# Altium PCB PowerSupplyPCB.PcbDoc
Units mm, origin at the board's own origin, x right, y up, seen from the top; angles counter-clockwise.
Board outline 100 x 50 mm, 2 copper layers (Top Layer, Bottom Layer); 11 components, 8 nets, 38 pads, 0 vias.
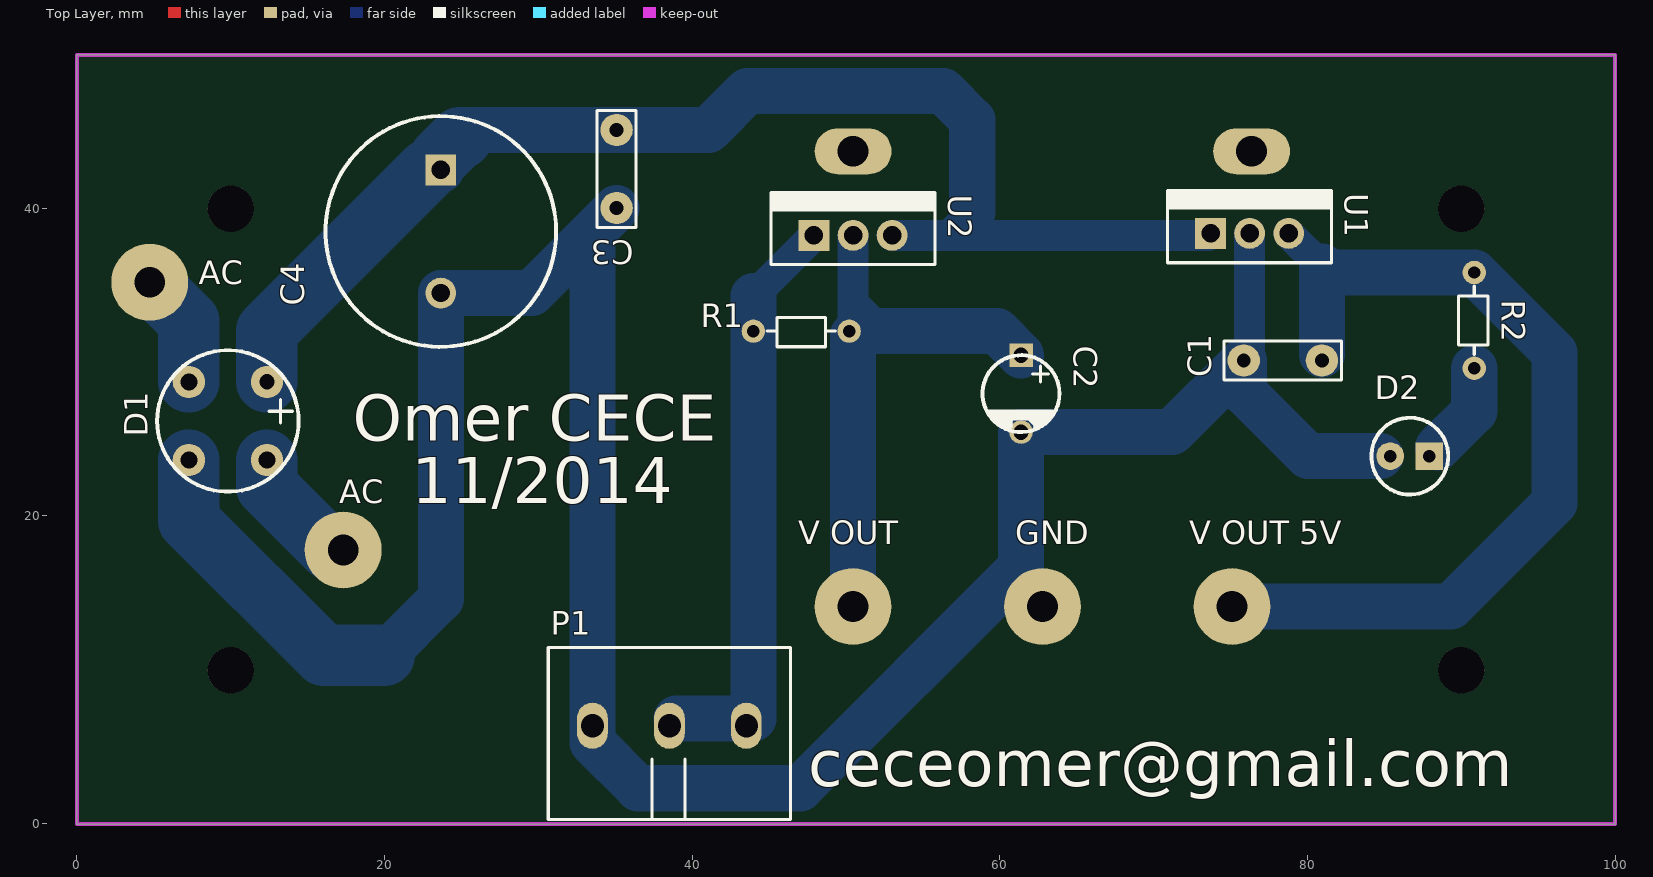
[diagram p0: Top Layer view]
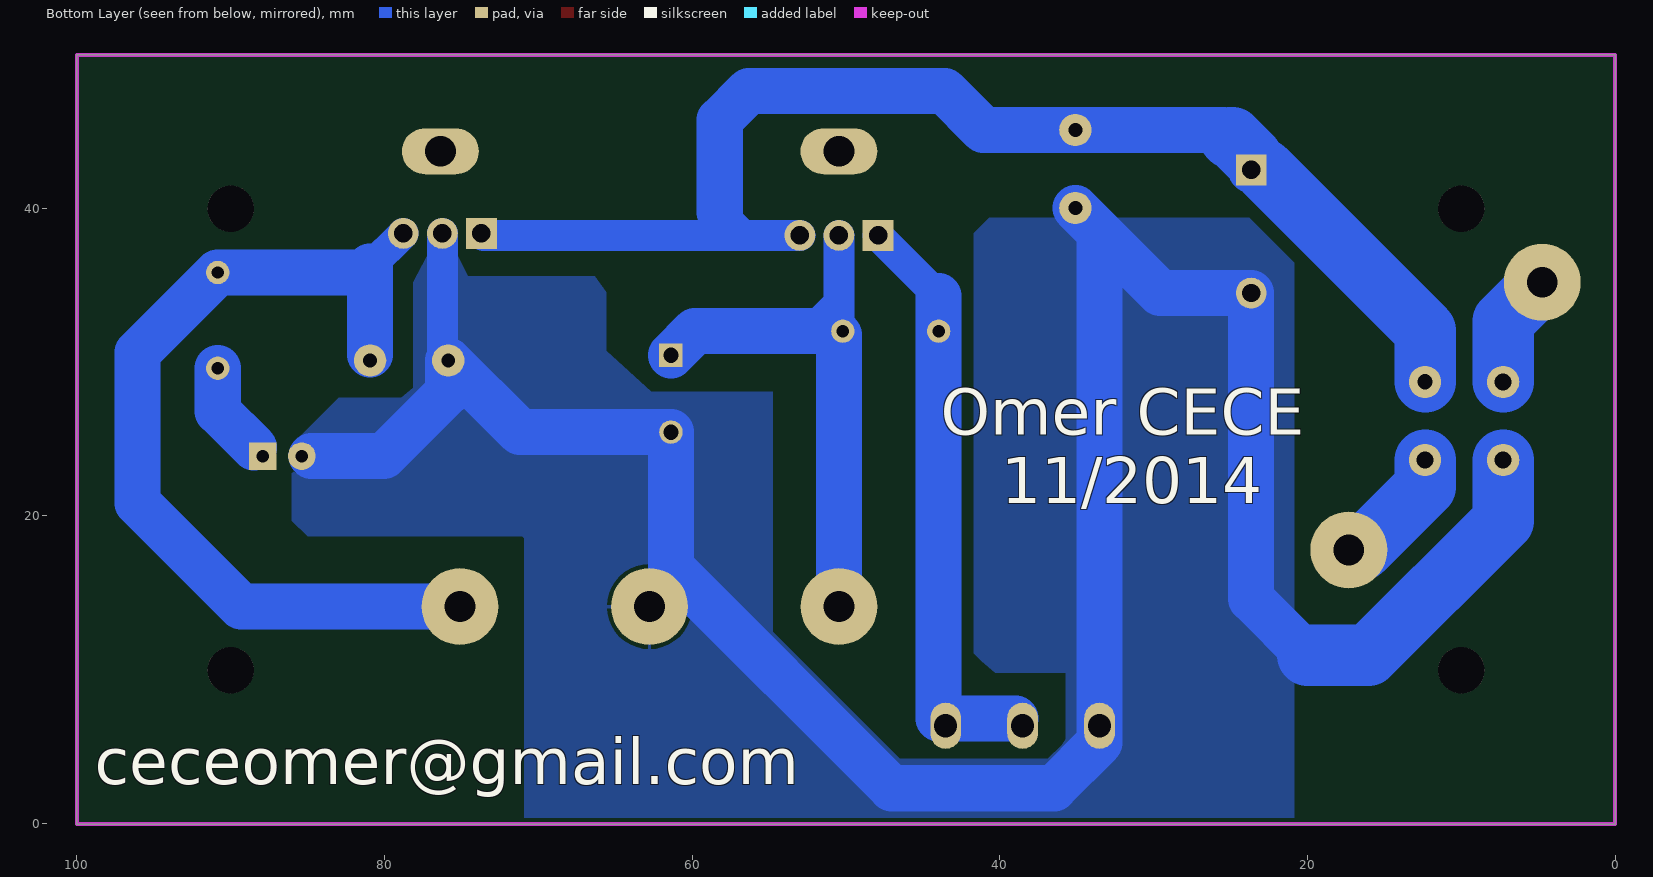
[diagram p1: Bottom Layer view, seen from below]
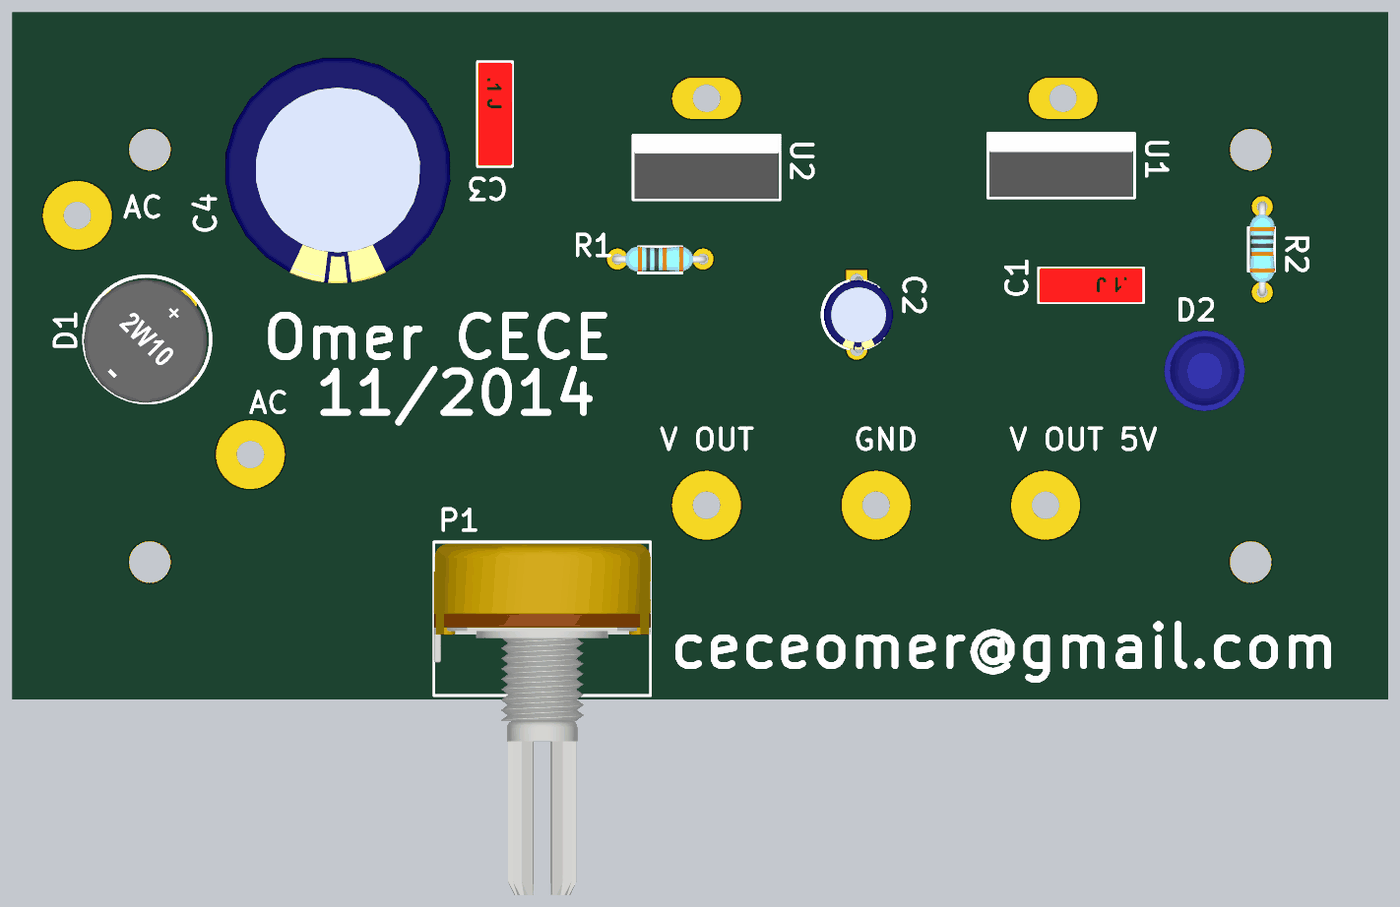
[diagram p2: 3D render of the assembled board from above, using the file's embedded part models]

## Layer stack, top to bottom
Top Layer: signal copper 0.0356
Dielectric: dielectric 0.32, FR-4, Dk 4.8
Bottom Layer: signal copper 0.0356

## Board outline
0,49.962 0,-0.038 100,-0.038 100,49.962

## Design rules (kind name [scope] priority, off if disabled: settings)
Clearance [All] p1: gap=0.254
ComponentClearance [All] p1 off: gap=0.254 collisioncheckmode=3 verticalgap=0.254 showdistances=FALSE
PolygonConnect [All] p1: connectstyle=Relief reliefconductorwidth=0.254 reliefentries=4 polygonreliefangle="90 Angle" airgapwidth=0.254
RoutingVias [All] p1: holewidth=0.711 width=1.27 viastyle="Through Hole" minholewidth=0.711 minwidth=1.27 maxholewidth=0.711 maxwidth=1.27
SolderMaskExpansion [All] p1: expansion=0.102
Width [All] p1: maxlimit=1000 minlimit=0.254 preferedwidth=1
27 further rules are at their usual default settings.

## Classes and differential pairs
component class LM317: C2 C3 C4 D1 P1 R1 U2
component class Led: D2 R2
component class 7805: C1 U1

## Components (designator, comment, footprint, x,y, rotation, side; value= is the part's Value field where it differs from the comment)
C1 "Cap" CAP1 80.937,30.099 r180 top
C2 "#NAME?" CAP2 61.379,27.94 r270 top
C3 "Cap" CAP1 35.09,45.085 r270 top
C4 "2200uF" CAP3 23.66,38.481 r270 top
D1 "KoptuDiyot" 2W10 9.817,26.162 r270 top
D2 "591-2101-013F" LED5MM 86.652,23.876 r0 top
P1 "Pot" POT 38.519,6.35 r0 top
R1 "Res" R1 43.98,32.004 r0 top
R2 "Res" R1 90.843,35.814 r270 top
U1 "L7805" TO220 76.238,38.354 r0 top
U2 "LM317" TO220 50.457,38.227 r0 top

## Footprints (in the part's own frame and the unit in brackets; to place one, negate y for a bottom-side part, rotate by r counter-clockwise, add the part's x,y. Pads: shape width x height; smd on the part's side, far side on the other; paste and mask are expansions set on the pad)
2W10 [mm] "KopruDiyot"
  round 2.1 hole 1: +(-2.54,2.54)
  round 2.1 hole 1.1: -(2.54,-2.54) AC1(-2.54,-2.54) AC2(2.54,2.54)
  silkscreen extent -4.6,-4.6 4.6,4.6, body extent -4.37,-4.63 4.63,4.37, height 8
CAP1 [mm] "100nF"
  round 2.1 hole 0.9: 1(0,0) 2(5.08,0)
  silkscreen extent -1.27,-1.27 6.35,1.27, body extent -1.21,-1.25 6.29,1.25, height 8.6
CAP2 [mm] "1uF"
  rect 1.524x1.524 hole 1: +(-2.5,0)
  round 1.524 hole 1: -(2.5,0)
  silkscreen extent -2.5,-2.5 2.5,2.5, body extent -2.79,-2.41 2.79,2.67, height 14.7
CAP3 [mm] "2200uF"
  rect 2x2 hole 1.2: +(-4,0)
  round 2 hole 1.2: -(4,0)
  silkscreen extent -7.5,-7.5 7.5,7.5, body extent -8.23,-8.23 8.25,8.23, height 26.9
LED5MM [mm] "Led5mm"
  rect 1.8x1.8 hole 0.8: A(1.27,0)
  round 1.8 hole 0.8: K(-1.27,0)
  silkscreen extent -2.5,-2.5 2.5,2.5, body extent -2.95,-2.95 2.95,2.95, height 12.6
POT [mm] "Pot"
  oval 2x3 hole 1.5: 1(-5,0) 2(5,0) 3(0,0)
  silkscreen extent -7.87,-6.1 7.87,5.08, body extent -7.87,-20.6 7.87,4.95, height 20.62
R1 [mil] "R 1/4W"
  round 60 hole 31.5: 1(0,0) 2(245,0)
  silkscreen extent 35,-40 210,35, body extent -15,-36 255,36, height 76
TO220 [mm] "LM317"
  rect 2x2 hole 1.2: 1(-2.54,0)
  round 2 hole 1.2: 2(0,0) 3(2.54,0)
  silkscreen extent -5.33,-1.91 5.33,2.79, body extent -5.2,-1.83 5.2,2.67, height 22

## Part data
C1 C3: library part R82DC3100DQ50J, "CAP FILM 0.1UF 63VDC RADIAL"
C2: library part B0510-2R5224-R, "CAP SUPER 0.22F 2.5V RADIAL"
C4: library part ECA-1VM222, "CAP ALUM 2200UF 35V 20% RADIAL"
D1: library part 2W10G-E4/51, "RECTIFIER BRIDGE 2A 1000V WOG"
P1: library part 3310C-001-103L, "POT 10K OHM 9MM SQ RTANG PLAST"
R1 R2: library part CF14JT10K0, "RES 10K OHM 1/4W 5% CARBON FILM"
U1: library part L7805ACV, "Linear Voltage Regulators 5.0V 1.0A Positive"
U2: library part LM317TG, "Linear Voltage Regulators 1.5A ADJ 1.2-37V Positive"

## Free pads (board coordinates)
  round 3 hole 3: 0(10,39.962) 1(10,9.962) 2(90,39.962) 3(90,9.962)
  round 5 hole 2: AC2(4.737,35.179) AC2(17.31,17.78) GND(62.776,14.097) VOUT(50.457,14.097) VOUT5V(75.095,14.097)
  oval 5x3 hole 2: Heatsink(50.457,43.691) Heatsink(76.365,43.691)

## Nets (pads, with @x,y where several pads share a name; then routed paths per layer and width w, separated by ;. In a path a pad name is that pad's centre, name@x,y a point inside that pad or via, vN(x,y) a via of type N, cw(c..) or ccw(c..) an arc to the next point about the centre after c; other vN are vias at no path point)
AC1: D1.AC1 pad.AC2@4.737,35.179 | length 7.5
  Bottom Layer w4: pad.AC2@4.737,35.179 7.277,32.639 D1.AC1
AC2: D1.AC2 pad.AC2@17.31,17.78 | length 7.5
  Bottom Layer w4: D1.AC2 12.357,21.882 pad.AC2@16.459,17.78
GND: C1.2 C2.- C3.2 C4.- D1.- D2.K P1.1 pad.GND U1.2 | length 176.4
  Bottom Layer w0.254: pad.GND@61.379,15.494 61.379,16.637 ; C1.2 C1.2@76.238,30.48
  Bottom Layer w2: C1.2@76.238,30.48 U1.2
  Bottom Layer w3: 19.977,10.922 23.66,14.605 C4.- ; C4.-@23.914,34.481 29.566,34.481 33.519,38.434 ; C3.2 33.519,38.434 ; pad.GND@61.379,15.494 pad.GND ; D2.K@84.747,23.876 80.048,23.876 75.857,28.067 C1.2 71.198,25.44 C2.- 61.379,16.637 47.028,2.286 36.487,2.286 33.519,5.254 P1.1 33.519,38.434
  Bottom Layer w4: D1.- 7.277,19.685 16.04,10.922 19.977,10.922
NetD2_A: D2.A R2.2 | length 6.1
  Bottom Layer w3: D2.A@88.494,24.447 90.843,26.797 R2.2
NetP1_2: P1.2 P1.3 R1.1 U2.1 | length 38.7
  Bottom Layer w0.254: P1.3 P1.3@38.98,6.811
  Bottom Layer w2: 43.98,34.29 U2.1
  Bottom Layer w3: P1.3@38.98,6.811 43.98,6.811 R1.1 43.98,34.29
VCC: C3.1 C4.+ D1.+ U1.1 U2.3 | length 85
  Bottom Layer w1: U1.1@73.571,38.227 U1.1
  Bottom Layer w2: U2.3 56.68,38.227 ; 58.204,39.751 56.68,38.227 ; U1.1@73.571,38.227 56.68,38.227
  Bottom Layer w3: C4.+@22.796,42.481 C4.+ ; 25.019,44.577 25.527,45.085 C3.1 41.059,45.085 43.599,47.625 56.299,47.625 58.204,45.72 58.204,39.751
  Bottom Layer w4: D1.+ 12.357,32.042 C4.+@22.796,42.481 ; C4.+@23.66,43.345 24.892,44.577 25.019,44.577
VOUT: C2.+ pad.VOUT R1.2 U2.2 | length 37.1
  Bottom Layer w1: 50.965,34.036 51.981,33.02
  Bottom Layer w2: R1.2 50.457,32.258 U2.2
  Bottom Layer w3: pad.VOUT 50.457,31.75 50.711,32.004 59.815,32.004 C2.+
VOUT5V: C1.1 pad.VOUT5V R2.1 U1.3 | length 59.7
  Bottom Layer w0.254: 80.937,36.195 81.318,35.814
  Bottom Layer w2: U1.3 80.937,36.195
  Bottom Layer w3: pad.VOUT5V 89.319,14.097 96.05,20.828 96.05,30.607 R2.1 81.318,35.814 ; C1.1@80.937,30.48 80.937,36.195

## Polygon pours and split planes (outlines as drawn)
GND on Bottom Layer "GND" (solid, pour order 2): 23.787,39.37 20.866,36.449 20.866,0.381 70.904,0.381 70.904,18.542 71.031,18.669 85.001,18.669 86.017,19.685 86.017,24.638 82.969,27.686 78.905,27.686 78.143,28.321 78.143,35.179 77.254,36.83 75.222,36.83 74.587,35.56 66.332,35.56 65.57,34.544 65.57,30.734 62.649,28.067 54.775,28.067 54.775,12.446 46.52,4.191 36.868,4.191 35.979,5.08 35.725,5.461 35.725,9.779 40.297,9.779 41.186,10.541 41.694,11.049 41.694,38.354 40.678,39.37

## Keep-outs
Keep-Out Layer:
  the board outline again, w0.254

## Silkscreen, mask and mechanical layers (free items; w line width, h text height)
Top Overlay:
  text "AC" at 7.912,35.052 h1.52
  text "Omer CECE" at 17.945,24.892 h3
  text "AC" at 17.056,20.828 h1.52
  text "11/2014" at 21.755,20.828 h3
  text "V OUT" at 46.901,18.161 h1.52
  text "GND" at 60.998,18.161 h1.52
  text "V OUT 5V" at 72.301,18.161 h1.52
  text "ceceomer@gmail.com" at 47.536,2.413 h3
Bottom Overlay:
  text "Omer CECE" at 43.853,25.273 h3
  text "11/2014" at 39.916,20.828 h3
  text "ceceomer@gmail.com" at 98.844,2.54 h3